# Altium PCB DT_AZP1524A1_PCB1_00A.PcbDoc (part 2 of 3)
Units mm, origin at the board's own origin, x right, y up, seen from the top; angles counter-clockwise.
Board outline 60 x 60.2 mm, 2 copper layers (Top Layer, Bottom Layer), stack 1.57 mm thick; 56 components, 46 nets, 205 pads, 364 vias.
Unrouted connection lines stored in the file: 1.
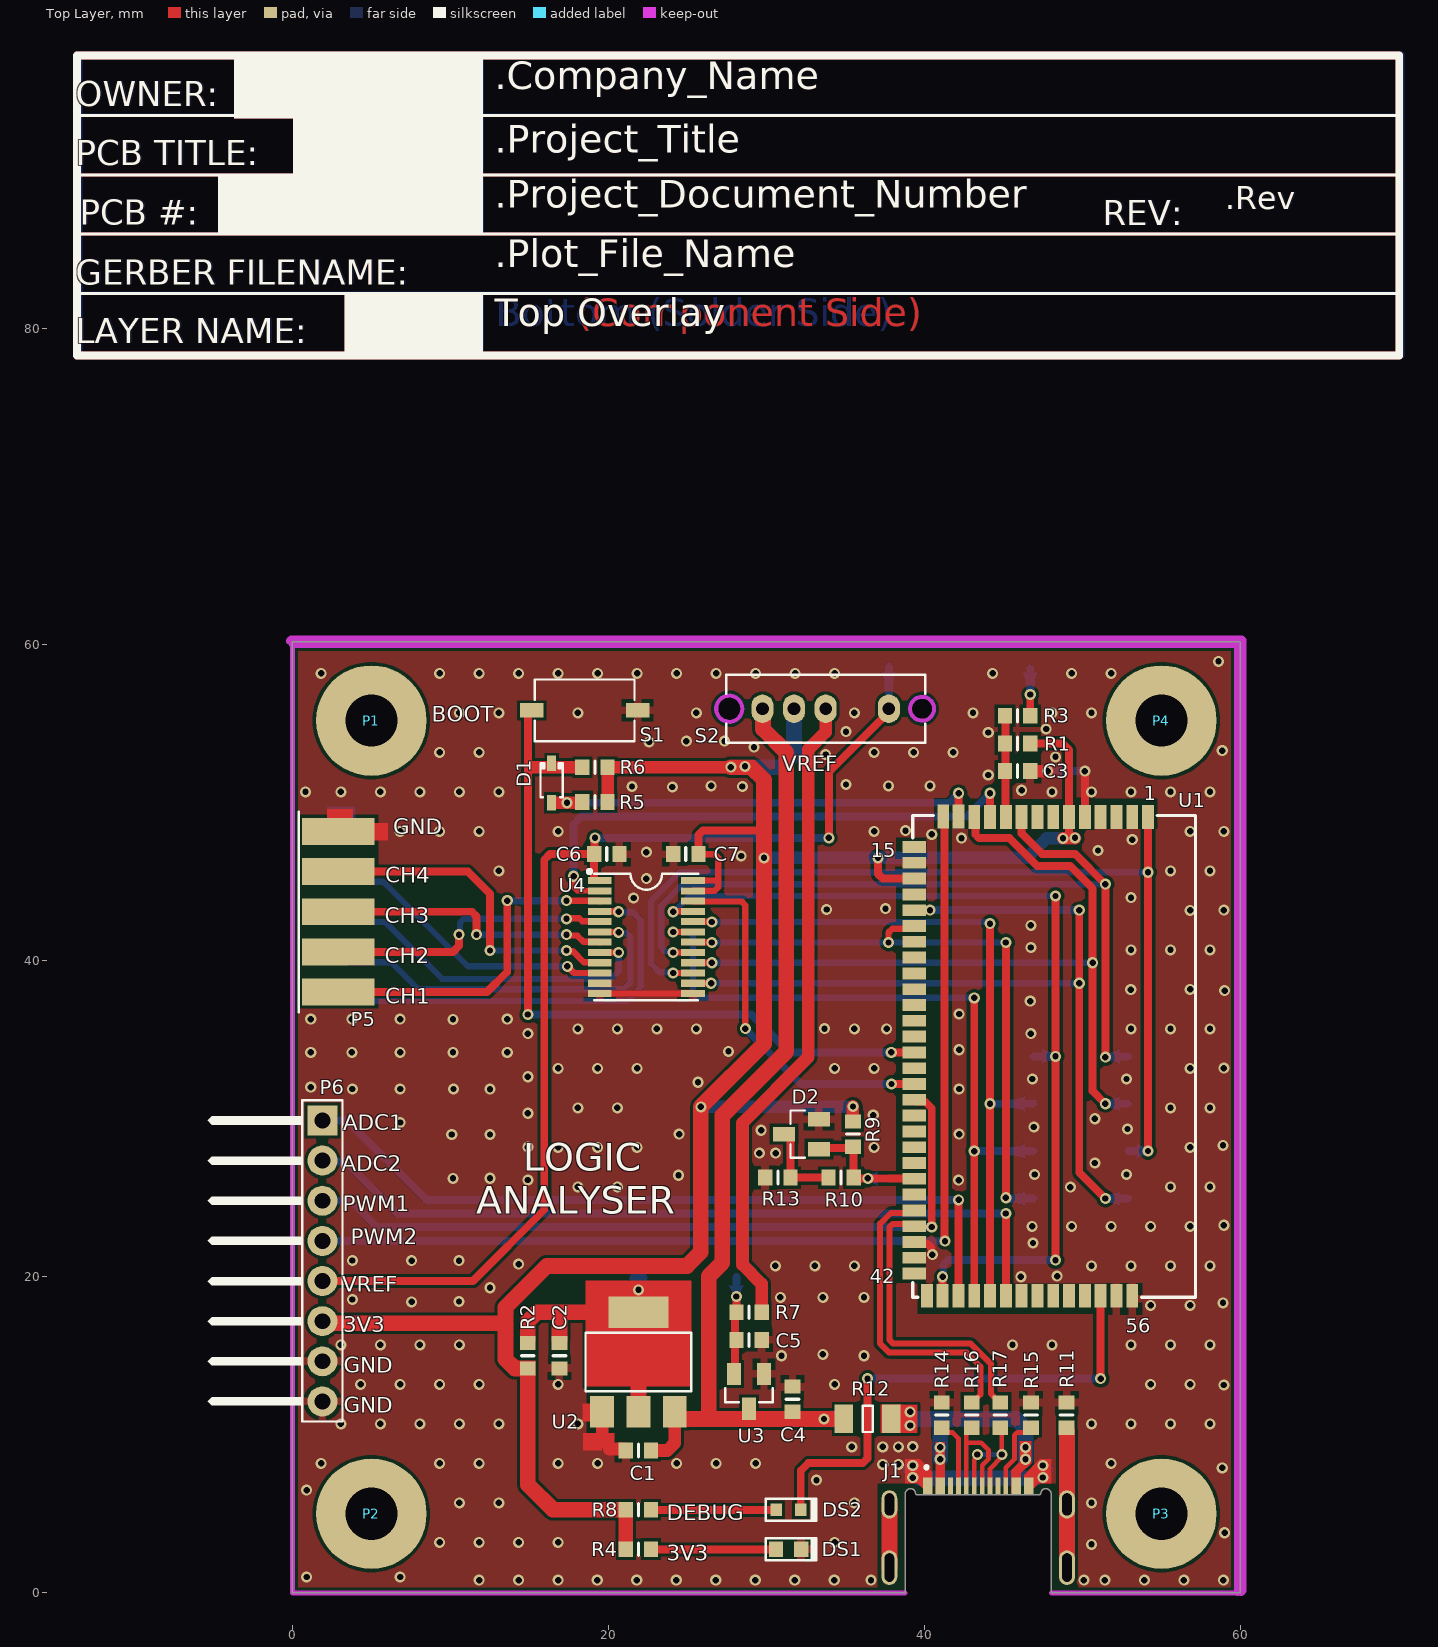
[diagram p0: Top Layer view]

## Silkscreen, mask and mechanical layers (free items; w line width, h text height) (continued)
Bottom Overlay: (continued)
  text ".Plot_File_Name" at 12.8,83.269 h3
  text "GERBER FILENAME:" at -13.7,82.225 h2.7
  text "Bottom Overlay" at 12.8,79.519 h3
  text "LAYER NAME:" at -13.7,78.519 h2.7
  text "Pb" at 17,54.441 h2
  text "GND" at 9.615,47.656 h1.7
  text "CH4" at 10.1,44.586 h1.7
  text "CH3" at 10.1,42.036 h1.7
  text "CH2" at 10.1,39.486 h1.7
  text "CH1" at 10.1,36.936 h1.7
  text "R" at 21.463,30.975 h0.9
  text "ProxSense" at 35.869,29.48 h3
  text "ADC1" at 8.6,28.936 h1.7
  text "ADC2" at 8.6,26.336 h1.7
  text "PWM1" at 8.6,23.803 h1.7
  text "PWM2" at 8.075,21.723 h1.7
  text "VREF" at 8.6,18.706 h1.7
  text "3V3" at 8.6,16.143 h1.7
  text "GND" at 8.6,13.586 h1.7
  text "GND" at 8.6,11.036 h1.7
  text "Y" at 24.937,5.292 h0.9
  text "Y" at 26.437,5.292 h0.9
  text "W" at 28.037,5.292 h0.9
  text "W" at 29.537,5.292 h0.9
  text ".Project_Document_Number" at 30.109,2.9 h0.9
Top Paste:
  rectangle: -3.7,93.3 12.05,97.3
  rectangle: 0.05,89.8 12.05,93.49
  rectangle: -4.7,86.05 12.05,89.8
  rectangle: 3.3,78.55 12.05,82.3
  lines w0.2: -13.626,82.24 70.05,82.24 ; -13.626,85.99 70.05,85.99 ; -13.626,93.49 70.05,93.49 ; -13.376,89.74 70.05,89.74
  lines w0.5: -13.626,78.3 70.05,78.3 70.05,97.3 -13.626,97.3 -13.626,78.3
  text ".Company_Name" at 12.8,94.55 h3
  text "OWNER:" at -13.7,93.55 h2.7
  text ".Project_Title" at 12.8,90.55 h3
  text "PCB TITLE:" at -13.7,89.8 h2.7
  text ".Project_Document_Number" at 12.8,87.05 h3
  text ".Rev" at 59.05,87.05 h2.5
  text "PCB #:" at -13.45,86.05 h2.7
  text "REV:" at 51.3,86.009 h2.7
  text ".Plot_File_Name" at 12.8,83.3 h3
  text "GERBER FILENAME:" at -13.7,82.255 h2.7
  text "Top Paste" at 12.8,79.55 h3
  text "LAYER NAME:" at -13.7,78.55 h2.7
  text "*** VIEW FROM SQUEGEE SIDE ***" at -6.7,73.05 h5
Bottom Paste:
  rectangle: -3.621,93.319 12.129,97.319
  rectangle: 0.129,89.819 12.129,93.509
  rectangle: -4.621,86.069 12.129,89.819
  rectangle: 3.379,78.569 12.129,82.319
  lines w0.2: -13.548,82.259 70.129,82.259 ; -13.548,86.009 70.129,86.009 ; -13.548,93.509 70.129,93.509 ; -13.298,89.759 70.129,89.759
  lines w0.5: -13.548,78.319 70.129,78.319 70.129,97.319 -13.548,97.319 -13.548,78.319
  text ".Company_Name" at 12.879,94.569 h3
  text "OWNER:" at -13.621,93.569 h2.7
  text ".Project_Title" at 12.879,90.569 h3
  text "PCB TITLE:" at -13.621,89.819 h2.7
  text ".Project_Document_Number" at 12.879,87.069 h3
  text ".Rev" at 59.129,87.069 h2.5
  text "PCB #:" at -13.371,86.069 h2.7
  text "REV:" at 51.379,86.028 h2.7
  text ".Plot_File_Name" at 12.879,83.319 h3
  text "GERBER FILENAME:" at -13.621,82.275 h2.7
  text "Bottom Paste" at 12.879,79.569 h3
  text "LAYER NAME:" at -13.621,78.569 h2.7
Top Solder:
  rectangle: -3.7,93.3 12.05,97.3
  rectangle: 0.05,89.8 12.05,93.49
  rectangle: -4.7,86.05 12.05,89.8
  rectangle: 3.3,78.55 12.05,82.3
  lines w0.2: -13.626,82.24 70.05,82.24 ; -13.626,85.99 70.05,85.99 ; -13.626,93.49 70.05,93.49 ; -13.376,89.74 70.05,89.74
  lines w0.5: -13.626,78.3 70.05,78.3 70.05,97.3 -13.626,97.3 -13.626,78.3
  text ".Company_Name" at 12.8,94.55 h3
  text "OWNER:" at -13.7,93.55 h2.7
  text ".Project_Title" at 12.8,90.55 h3
  text "PCB TITLE:" at -13.7,89.8 h2.7
  text ".Project_Document_Number" at 12.8,87.05 h3
  text ".Rev" at 59.05,87.05 h2.5
  text "PCB #:" at -13.45,86.05 h2.7
  text "REV:" at 51.3,86.009 h2.7
  text ".Plot_File_Name" at 12.8,83.3 h3
  text "GERBER FILENAME:" at -13.7,82.255 h2.7
  text "Top Soldermask" at 12.8,79.55 h3
  text "LAYER NAME:" at -13.7,78.55 h2.7
Bottom Solder:
  rectangle: 3.379,78.569 12.129,82.319
  rectangle: -4.621,86.069 12.129,89.819
  rectangle: 0.129,89.819 12.129,93.509
  rectangle: -3.621,93.319 12.129,97.319
  lines w0.2: -13.548,82.259 70.129,82.259 ; -13.548,86.009 70.129,86.009 ; -13.548,93.509 70.129,93.509 ; -13.298,89.759 70.129,89.759
  lines w0.5: -13.548,78.319 -13.548,97.319 70.129,97.319 70.129,78.319 -13.548,78.319
  text ".Company_Name" at 12.879,94.569 h3
  text "OWNER:" at -13.621,93.569 h2.7
  text ".Project_Title" at 12.879,90.569 h3
  text "PCB TITLE:" at -13.621,89.819 h2.7
  text ".Project_Document_Number" at 12.879,87.069 h3
  text ".Rev" at 59.129,87.069 h2.5
  text "PCB #:" at -13.371,86.069 h2.7
  text "REV:" at 51.379,86.028 h2.7
  text ".Plot_File_Name" at 12.879,83.319 h3
  text "GERBER FILENAME:" at -13.621,82.275 h2.7
  text "Bottom Soldermask" at 12.879,79.569 h3
  text "LAYER NAME:" at -13.621,78.569 h2.7
Drill Guide:
  rectangle: 3.3,78.55 12.05,82.3
  rectangle: -4.7,86.05 12.05,89.8
  rectangle: 0.05,89.8 12.05,93.49
  rectangle: -3.7,93.3 12.05,97.3
  lines w0.2: -13.626,82.24 70.05,82.24 ; -13.626,85.99 70.05,85.99 ; -13.626,93.49 70.05,93.49 ; -13.376,89.74 70.05,89.74
  lines w0.5: -13.626,78.3 -13.626,97.3 70.05,97.3 70.05,78.3 -13.626,78.3
  text ".Company_Name" at 12.8,94.55 h3
  text "OWNER:" at -13.7,93.55 h2.7
  text ".Project_Title" at 12.8,90.55 h3
  text "PCB TITLE:" at -13.7,89.8 h2.7
  text ".Project_Document_Number" at 12.8,87.05 h3
  text ".Rev" at 59.05,87.05 h2.5
  text "PCB #:" at -13.45,86.05 h2.7
  text "REV:" at 51.3,86.009 h2.7
  text ".Plot_File_Name" at 12.8,83.3 h3
  text "GERBER FILENAME:" at -13.7,82.255 h2.7
  text "Drill Guide" at 12.8,79.55 h3
  text "LAYER NAME:" at -13.7,78.55 h2.7
PCB Outline:
  rectangle: -3.7,93.3 12.05,97.3
  rectangle: 0.05,89.8 12.05,93.49
  rectangle: -4.7,86.05 12.05,89.8
  rectangle: 3.3,78.55 12.05,82.3
  lines w0.2: -13.626,82.24 70.05,82.24 ; -13.626,85.99 70.05,85.99 ; -13.626,93.49 70.05,93.49 ; -13.376,89.74 70.05,89.74 ; 38.784,0 0,0 0,60.2 60,60.2 60,0 48.024,0
  lines w0.5: -13.626,78.3 70.05,78.3 70.05,97.3 -13.626,97.3 -13.626,78.3
  text ".Company_Name" at 12.8,94.55 h3
  text "OWNER:" at -13.7,93.55 h2.7
  text ".Project_Title" at 12.8,90.55 h3
  text "PCB TITLE:" at -13.7,89.8 h2.7
  text ".Project_Document_Number" at 12.8,87.05 h3
  text ".Rev" at 59.05,87.05 h2.5
  text "PCB #:" at -13.45,86.05 h2.7
  text "REV:" at 51.3,86.009 h2.7
  text ".Plot_File_Name" at 12.8,83.3 h3
  text "GERBER FILENAME:" at -13.7,82.255 h2.7
  text "PCB Outline" at 12.8,79.55 h3
  text "LAYER NAME:" at -13.7,78.55 h2.7
Peelable Blue Top:
  rectangle: 3.3,78.55 12.05,82.3
  rectangle: -4.7,86.05 12.05,89.8
  rectangle: 0.05,89.8 12.05,93.49
  rectangle: -3.7,93.3 12.05,97.3
  lines w0.2: -13.626,82.24 70.05,82.24 ; -13.626,85.99 70.05,85.99 ; -13.626,93.49 70.05,93.49 ; -13.376,89.74 70.05,89.74
  lines w0.5: -13.626,78.3 -13.626,97.3 70.05,97.3 70.05,78.3 -13.626,78.3
  text ".Company_Name" at 12.8,94.55 h3
  text "OWNER:" at -13.7,93.55 h2.7
  text ".Project_Title" at 12.8,90.55 h3
  text "PCB TITLE:" at -13.7,89.8 h2.7
  text ".Project_Document_Number" at 12.8,87.05 h3
  text ".Rev" at 59.05,87.05 h2.5
  text "PCB #:" at -13.45,86.05 h2.7
  text "REV:" at 51.3,86.009 h2.7
  text ".Plot_File_Name" at 12.8,83.3 h3
  text "GERBER FILENAME:" at -13.7,82.255 h2.7
  text "Peelable Blue Top" at 12.8,79.55 h3
  text "LAYER NAME:" at -13.7,78.55 h2.7
Peelable Blue Bot:
  rectangle: -3.7,93.3 12.05,97.3
  rectangle: 0.05,89.8 12.05,93.49
  rectangle: -4.7,86.05 12.05,89.8
  rectangle: 3.3,78.55 12.05,82.3
  lines w0.2: -13.626,82.24 70.05,82.24 ; -13.626,85.99 70.05,85.99 ; -13.626,93.49 70.05,93.49 ; -13.376,89.74 70.05,89.74
  lines w0.5: -13.7,78.3 69.976,78.3 ; -13.626,78.3 -13.626,97.3 70.05,97.3 70.05,78.3
  text ".Company_Name" at 12.8,94.55 h3
  text "OWNER:" at -13.7,93.55 h2.7
  text ".Project_Title" at 12.8,90.55 h3
  text "PCB TITLE:" at -13.7,89.8 h2.7
  text ".Project_Document_Number" at 12.8,87.05 h3
  text ".Rev" at 59.05,87.05 h2.5
  text "PCB #:" at -13.45,86.05 h2.7
  text "REV:" at 51.3,86.009 h2.7
  text ".Plot_File_Name" at 12.8,83.3 h3
  text "GERBER FILENAME:" at -13.7,82.255 h2.7
  text "Peelable Blue Bottom" at 12.8,79.55 h3
  text "LAYER NAME:" at -13.7,78.55 h2.7
Selective Gold Top:
  rectangle: -3.7,93.3 12.05,97.3
  rectangle: 0.05,89.8 12.05,93.49
  rectangle: -4.7,86.05 12.05,89.8
  rectangle: 3.3,78.55 12.05,82.3
  lines w0.2: -13.626,82.24 70.05,82.24 ; -13.626,85.99 70.05,85.99 ; -13.626,93.49 70.05,93.49 ; -13.376,89.74 70.05,89.74
  lines w0.5: -13.626,78.3 70.05,78.3 70.05,97.3 -13.626,97.3 -13.626,78.3
  text ".Company_Name" at 12.8,94.55 h3
  text "OWNER:" at -13.7,93.55 h2.7
  text ".Project_Title" at 12.8,90.55 h3
  text "PCB TITLE:" at -13.7,89.8 h2.7
  text ".Project_Document_Number" at 12.8,87.05 h3
  text ".Rev" at 59.05,87.05 h2.5
  text "PCB #:" at -13.45,86.05 h2.7
  text "REV:" at 51.3,86.009 h2.7
  text ".Plot_File_Name" at 12.8,83.3 h3
  text "GERBER FILENAME:" at -13.7,82.255 h2.7
  text "Selective Hard Gold Top" at 12.8,79.55 h3
  text "LAYER NAME:" at -13.7,78.55 h2.7